# EAGLE board Counter2DigitRG (EAGLE 6.4)
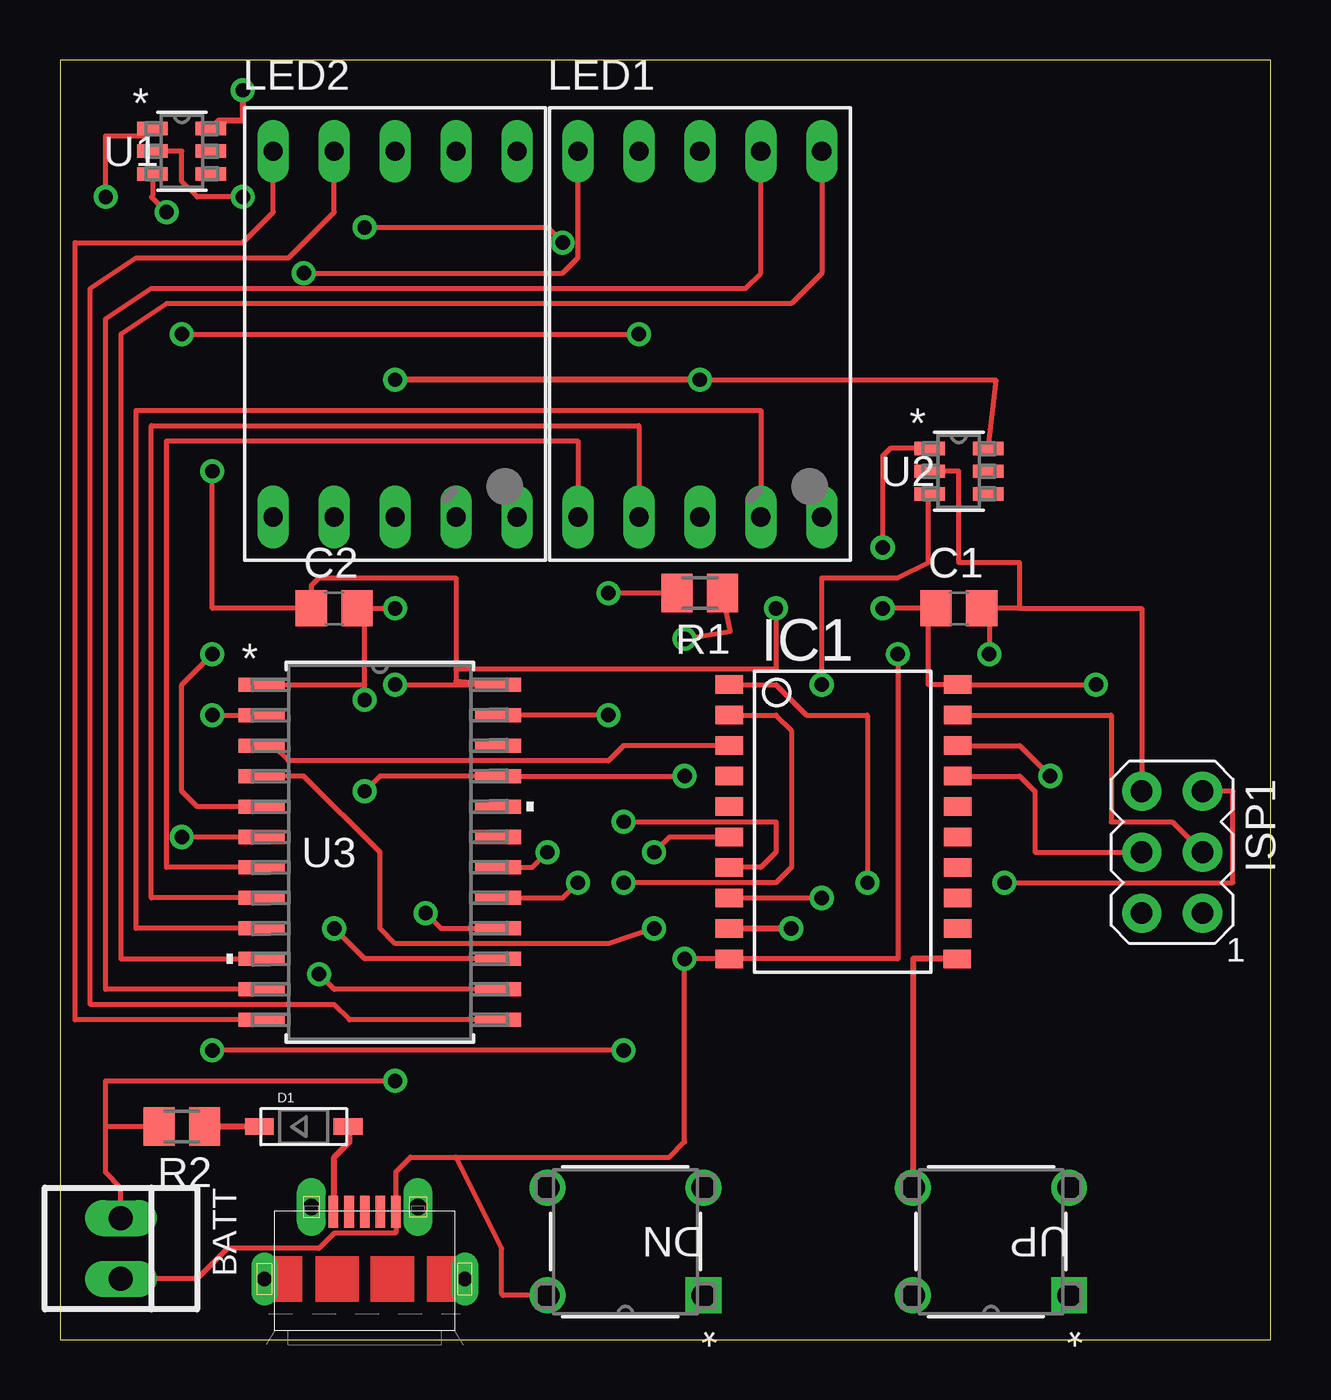
[diagram p0: board, top side]
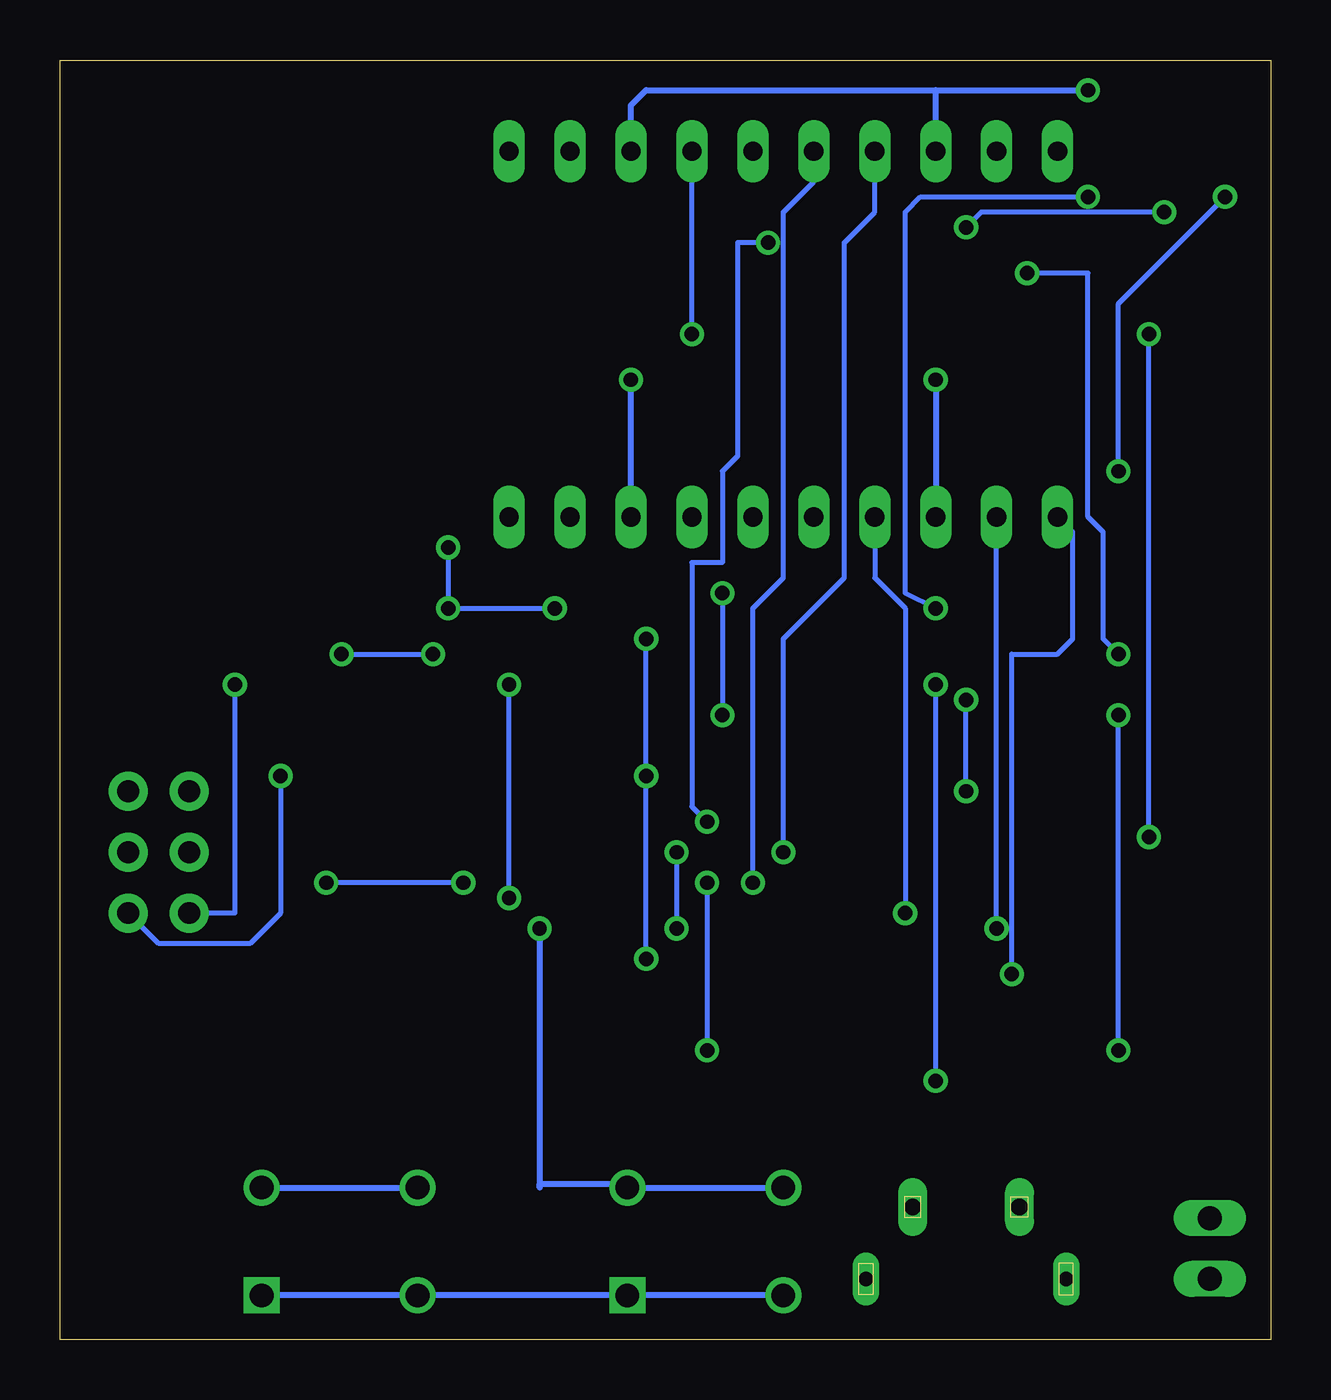
[diagram p1: board, bottom side, seen from below]

Size 50.47 x 53.33 mm. Coordinates in mm from the lower left corner, seen from the top.
Outline: 0,0 50.47,0 50.47,53.33 0,53.33 0,0
Copper layers (1*16): Top 0.035mm / dielectric 1.5mm / Bottom 0.035mm
Design rules "default": minimum track width 10mil, minimum drill 24mil, track to track 8mil, track to pad 8mil, pad to pad 8mil, via to via 8mil, smd to smd 8mil, copper to edge 40mil, drill to drill 8mil, minimum pad ring 10mil, minimum via ring 8mil, stop-mask expansion 4mil, vias tented up to drill 0mil, thermal gap 10mil

## Footprints (pad centres in the part's own frame; a part is rotated, then mirrored left to right if it is on the bottom)
22-23-2021 = drill 1 long: 1 -1.27,0; 2 1.27,0
C0805 = smd 1.3 x 1.5: 1 -0.95,0; 2 0.95,0
SOD-123 = smd 1.2 x 0.7: A 1.85,0; C -1.85,0
SW4_1825910-D = drill 0.991 pad 1.499 square: 1 -6.502,4.496 | drill 0.991 pad 1.499: 2 0,4.496; 3 -6.502,0; 4 0,0
SO20L = smd 0.762 x 1.143: 1 -5.08,-5.131; 2 -3.81,-5.131; 3 -2.54,-5.131; 4 -1.27,-5.131; 5 0,-5.131; 6 1.27,-5.131; 7 2.54,-5.131; 8 3.81,-5.131; 9 5.08,-5.131; 10 6.35,-5.131; 11 6.35,4.369; 12 5.08,4.394; 13 3.81,4.394; 14 2.54,4.394; 15 1.27,4.394; 16 0,4.394; 17 -1.27,4.394; 18 -2.54,4.394; 19 -3.81,4.394; 20 -5.08,4.394
AVRISP = drill 0.9 pad 1.626: 1 -1.27,2.54; 2 1.27,2.54; 3 -1.27,0; 4 1.27,0; 5 -1.27,-2.54; 6 1.27,-2.54
SA56-11 = drill 0.8 long: 1 -5.08,-7.62; 2 -2.54,-7.62; 3 0,-7.62; 4 2.54,-7.62; 5 5.08,-7.62; 6 5.08,7.62; 7 2.54,7.62; 8 0,7.62; 9 -2.54,7.62; 10 -5.08,7.62
M0805 = smd 1.3 x 1.6: 1 -0.95,0; 2 0.95,0
SOT-23-6_M6 = smd 1.27 x 0.559: 1 -1.219,0.95; 2 -1.219,0; 3 -1.219,-0.95; 4 1.219,-0.95; 5 1.219,0; 6 1.219,0.95
SO-24-M = smd 1.905 x 0.584: 1 -4.928,6.985; 2 -4.928,5.715; 3 -4.928,4.445; 4 -4.928,3.175; 5 -4.928,1.905; 6 -4.928,0.635; 7 -4.928,-0.635; 8 -4.928,-1.905; 9 -4.928,-3.175; 10 -4.928,-4.445; 11 -4.928,-5.715; 12 -4.928,-6.985; 13 4.928,-6.985; 14 4.928,-5.715; 15 4.928,-4.445; 16 4.928,-3.175; 17 4.928,-1.905; 18 4.928,-0.635; 19 4.928,0.635; 20 4.928,1.905; 21 4.928,3.175; 22 4.928,4.445; 23 4.928,5.715; 24 4.928,6.985
47589-0001 = smd 1.35 x 0.4: 1 2.8,1.3; 2 2.8,0.65; 3 2.8,0; 4 2.8,-0.65; 5 2.8,-1.3 | drill 0.6 pad 0.95 long: CASING1 0,4.175; CASING2 0,-4.175 | drill 0.7 pad 1.1 long: CASING3 3,2.225; CASING4 3,-2.225

## Placement (x,y rotation side)
BATT  [22-23-2021]  2.54,3.81 270 top
C1  [C0805]  37.47,30.48 0 top
C2  1uF  [C0805]  11.43,30.48 0 top
D1  [SOD-123]  10.16,8.89 0 top
DN  [SW4_1825910-D]  20.32,6.35 180 top
IC1  [SO20L]  33.02,22.23 270 top
ISP1  AVRISP-6  [AVRISP]  46.35,20.32 180 top
LED1  [SA56-11]  26.67,41.91 0 top
LED2  [SA56-11]  13.97,41.91 0 top
R1  [M0805]  26.67,31.11 180 top
R2  [M0805]  5.08,8.89 180 top
U1  [SOT-23-6_M6]  5.08,49.53 0 top
U2  [SOT-23-6_M6]  37.47,36.2 0 top
U3  [SO-24-M]  13.34,20.32 0 top
U$1  MICRO-USB-RECEPTACLE47589-0001  [47589-0001]  12.7,2.54 90 top
UP  [SW4_1825910-D]  35.56,6.35 180 top

## Library data of the parts
BATT = con-molex; MF: MOLEX; MPN: 22-23-2021; OC_FARNELL: 1462926; OC_NEWARK: 25C3832
C1 C2 R1 R2 = rcl
D1 ISP1 = adafruit
DN UP = switch-alcoswitch-pb; BUILT_BY: EMA_UL_Team; CONFIGURATION__POLE-THROW_: Single Pole - Single Throw; COPYRIGHT: Copyright (C) 2016 Accelerated Designs. All rights reserved; DESCRIPTION: FSM8JH=6MM TACT SWITCH, HIGH TEMP; MANUFACTURER_PART_NUMBER: 1-1825910-4; MAX_SWITCHING_CURRENT: -; MAX_SWITCHING_VOLTAGE_AC_: -; PRODUCT_TYPE: Switch; SWITCH_TYPE: Tactile Switches; TE_PART_NUMBER: 1-1825910-4; VENDOR: TE Connectivity
IC1 = atmel; OC_FARNELL: unknown; OC_NEWARK: unknown
LED1 LED2 = display-kingbright; OC_FARNELL: unknown; OC_NEWARK: unknown
U1 U2 = MIC2005A; BUILT_BY: EMA_Jessica; COPYRIGHT: Copyright (C) 2018 Accelerated Designs. All rights reserved; MANUFACTURER_PART_NUMBER: MIC2005A-2YM6-TR; VENDOR: Microchip
U3 = STP16CPC26; BUILT_BY: EMA_UL_Team; MANUFACTURER_PART_NUMBER: STP16CPC26MTR; VENDOR: STMicroelectronics
U$1 = con-molex-usb

## Nets
DGND: BATT.2 C1.2 C2.2 DN.1 DN.2 IC1.10 ISP1.6 R1.1 U1.2 U2.2 U3.1 U3.21 U$1.5 UP.1 UP.2
N$1: LED2.2 U3.15
N$2: LED1.3 LED2.3 U2.6
N$3: IC1.6 U3.4
N$4: LED1.8 LED2.8 U1.6
N$5: DN.3 DN.4 IC1.9
N$6: IC1.11 UP.3 UP.4
N$7: R1.2 U3.23
N$8: IC1.2 U3.2
N$9: IC1.3 U3.3
N$10: IC1.18 ISP1.1
N$11: IC1.7 U1.3
N$12: IC1.8 U2.3
N$13: IC1.1 ISP1.5
N$14: IC1.19 ISP1.3
N$15: IC1.17 ISP1.4
N$16: LED2.9 U3.13
N$17: LED1.10 U3.5
N$18: LED1.9 U3.6
N$19: LED1.1 U3.7
N$20: LED1.2 U3.8
N$21: LED1.4 U3.9
N$22: LED1.6 U3.10
N$23: LED1.7 U3.11
N$24: LED2.10 U3.12
N$25: LED2.1 U3.14
N$26: LED2.4 U3.16
N$27: LED2.6 U3.17
N$28: LED2.7 U3.18
N$29: D1.A U$1.1
N$30: D1.C R2.1
VCC: BATT.1 C1.1 C2.1 IC1.20 ISP1.2 R2.2 U1.1 U2.1 U3.24

## Tracks (layer width: path | path; a pad name or v marks a point on that pad's centre or on a via)
DGND  (via drill 0.6)
  Top 0.203: 16.51,7.62 14.61,7.62 14,7.01 U$1.5 14,4.47 13.97,4.45 11.43,4.45 10.79,3.81 6.99,3.81 5.71,2.54 BATT.2 | 16.51,7.62 18.41,3.81 18.41,1.91 18.47,1.85 DN.2 | U3.1 12.7,27.3 | 12.7,27.3 12.7,30.16 C2.2 v13.97,30.48 | v12.7,22.86 13.34,23.5 U3.21 v26.04,23.5 | v12.7,26.67 12.7,27.3 | v7.62,47.62 5.71,47.62 5.08,48.26 5.08,49.53 U1.2 | v26.04,29.21 27.94,29.52 R1.1 | 40.01,30.48 45.09,30.48 ISP1.6 | 40.01,30.48 40.01,32.38 37.47,32.38 37.47,36.2 U2.2 | 16.51,7.62 25.4,7.62 26.04,8.26 v26.04,15.88 IC1.10 34.92,15.88 v34.92,28.57 | C1.2 38.73,30.48 | 40.01,30.48 38.73,30.48 | 38.73,30.48 v38.73,28.57
  Bottom 0.203: v12.7,22.86 v12.7,26.67 | v13.97,30.48 15.24,31.11 15.24,46.99 14.61,47.62 v7.62,47.62 | v26.04,29.21 v26.04,23.5 v26.04,15.88 | v38.73,28.57 v34.92,28.57
  Bottom 0.254: DN.2 DN.1 UP.2 UP.1
N$1  (via drill 0.6)
  Top 0.203: U3.15 12.7,15.88 v11.43,17.14
  Bottom 0.203: v11.43,17.14 LED2.2
N$2  (via drill 0.6)
  Top 0.203: v13.97,40.01 39,40.01 U2.6
  Top 0.254: v26.67,40.01 v13.97,40.01
  Bottom 0.254: LED1.3 v26.67,40.01 | v13.97,40.01 LED2.3
N$3  (via drill 0.6)
  Top 0.203: IC1.6 25.4,20.95 v24.77,20.32 | v24.77,17.14 22.86,16.51 13.97,16.51 13.34,17.14 13.34,20.32 10.16,23.5 U3.4
  Bottom 0.203: v24.77,20.32 v24.77,17.14
N$4  (via drill 0.6)
  Top 0.254: v7.62,52.07 7.62,50.8 6.62,50.8 U1.6
  Bottom 0.254: LED1.8 26.67,51.44 26.04,52.07 13.97,52.07 | LED2.8 13.97,52.07 | 13.97,52.07 v7.62,52.07
N$5  (via drill 0.6)
  Top 0.254: IC1.9 v30.48,17.14
  Bottom 0.254: v30.48,17.14 30.48,10.16 30.48,6.35 30.48,6.5 26.67,6.5 DN.3 DN.4
N$6
  Top 0.254: IC1.11 35.56,15.88 UP.4
  Bottom 0.254: UP.3 UP.4
N$7  (via drill 0.6)
  Top 0.203: v22.86,26.04 U3.23 | 26.04,31.11 v22.86,31.11
  Bottom 0.203: v22.86,31.11 v22.86,26.04
N$8  (via drill 0.6)
  Top 0.203: IC1.2 29.84,26.04 30.48,25.4 30.48,19.68 29.84,19.05 v23.5,19.05 | v23.5,12.06 v6.35,12.06 | v6.35,26.04 U3.2
  Bottom 0.203: v23.5,19.05 v23.5,12.06 | v6.35,12.06 v6.35,26.04
N$9
  Top 0.203: IC1.3 23.5,24.77 22.86,24.13 9.53,24.13 8.89,24.77 U3.3
N$10  (via drill 0.6)
  Top 0.203: IC1.18 40.01,24.77 v41.27,23.5
  Bottom 0.203: v41.27,23.5 41.27,17.78 42.55,16.51 46.35,16.51 ISP1.1
N$11  (via drill 0.6)
  Top 0.203: U1.3 3.86,47.68 3.81,47.62 v4.45,46.99 | v12.7,46.35 20.32,46.35 v20.95,45.72 | v23.5,21.59 29.84,21.59 29.84,20.32 29.21,19.68 IC1.7
  Bottom 0.203: v4.45,46.99 12.06,46.99 v12.7,46.35 | v20.95,45.72 22.23,45.72 22.23,36.83 22.86,36.2 22.86,32.38 24.13,32.38 24.13,22.23 v23.5,21.59
N$12  (via drill 0.6)
  Top 0.203: IC1.8 v31.75,18.41 | v31.75,27.3 31.75,31.75 34.92,31.75 36.2,32.38 36.2,35.19 U2.3
  Bottom 0.203: v31.75,18.41 v31.75,27.3
N$13  (via drill 0.6)
  Top 0.203: IC1.1 29.84,27.3 31.11,26.04 33.66,26.04 v33.66,19.05 | v39.37,19.05 48.9,19.05 48.9,22.86 ISP1.5
  Bottom 0.203: v33.66,19.05 v39.37,19.05
N$14
  Top 0.203: IC1.19 43.81,26.04 43.81,21.59 46.35,21.59 ISP1.3
N$15
  Top 0.203: IC1.17 40.01,23.5 40.64,22.86 40.64,20.32 ISP1.4
N$16
  Top 0.203: U3.13 12.06,13.34 11.43,13.97 1.27,13.97 1.27,43.81 3.17,45.09 9.53,45.09 11.43,46.99 LED2.9
N$17  (via drill 0.6)
  Top 0.203: U3.5 5.71,22.23 5.08,22.86 5.08,27.3 v6.35,28.57 | v10.16,44.45 20.95,44.45 21.59,45.09 LED1.10
  Bottom 0.203: v6.35,28.57 6.99,29.21 6.99,33.66 7.62,34.29 7.62,44.45 v10.16,44.45
N$18  (via drill 0.6)
  Top 0.203: U3.6 v5.08,20.95 | v5.08,41.91 v24.13,41.91
  Bottom 0.203: v5.08,20.95 v5.08,41.91 | v24.13,41.91 LED1.9
N$19
  Top 0.203: U3.7 4.45,19.68 4.45,37.47 21.59,37.47 LED1.1
N$20
  Top 0.203: U3.8 3.81,18.41 3.81,38.1 24.13,38.1 LED1.2
N$21
  Top 0.203: U3.9 3.17,17.14 3.17,38.73 29.21,38.73 LED1.4
N$22
  Top 0.203: LED1.6 31.75,44.45 30.48,43.18 4.45,43.18 2.54,41.91 2.54,15.88 U3.10
N$23
  Top 0.203: U3.11 1.91,14.61 1.91,42.55 3.81,43.81 28.57,43.81 29.21,44.45 LED1.7
N$24
  Top 0.203: U3.12 0.64,13.34 0.64,45.72 7.62,45.72 8.89,46.99 LED2.10
N$25  (via drill 0.6)
  Top 0.203: U3.14 11.43,14.61 v10.79,15.24
  Bottom 0.203: v10.79,15.24 10.79,28.57 8.89,28.57 8.26,29.21 8.26,33.66 LED2.1
N$26  (via drill 0.6)
  Top 0.203: v15.24,17.78 15.88,17.14 U3.16
  Bottom 0.203: LED2.4 16.51,31.75 15.24,30.48 v15.24,17.78
N$27  (via drill 0.6)
  Top 0.203: U3.17 20.95,18.41 v21.59,19.05
  Bottom 0.203: v21.59,19.05 21.59,30.48 20.32,31.75 20.32,46.99 19.05,48.26 LED2.6
N$28  (via drill 0.6)
  Top 0.203: U3.18 19.68,19.68 v20.32,20.32
  Bottom 0.203: v20.32,20.32 20.32,29.21 17.78,31.75 17.78,45.72 16.51,46.99 LED2.7
N$29
  Top 0.254: U$1.1 11.43,5.34 11.43,7.62 12.06,8.26 12.06,8.84 D1.A
N$30
  Top 0.254: D1.C R2.1
VCC  (via drill 0.6)
  Top 0.203: 36.2,30.16 36.2,30.48 v34.29,30.48 | 36.2,30.16 C1.1 | v43.18,27.3 IC1.20 36.2,27.3 36.2,30.16 | v29.84,30.48 29.84,27.94 16.51,27.94 | 16.51,27.94 16.51,27.46 U3.24 v13.97,27.3 | BATT.1 2.54,6.35 1.91,6.99 1.91,8.89 | U2.1 34.6,37.15 34.29,36.83 v34.29,33.02 | 16.51,27.94 16.51,31.75 10.79,31.75 10.48,31.43 C2.1 6.35,30.48 v6.35,36.2 | v1.91,47.62 1.91,50.16 3.55,50.16 U1.1 | R2.2 1.91,8.89 | 1.91,8.89 1.91,10.79 v13.97,10.79
  Bottom 0.203: v43.18,27.3 43.18,17.78 ISP1.2 | v29.84,30.48 v34.29,30.48 v34.29,33.02 | v6.35,36.2 6.35,43.18 v1.91,47.62 | v13.97,10.79 v13.97,27.3